# Altium PCB TPA6120A-PCB.pcbdoc
Units mil, origin at the board's own origin, x right, y up, seen from the top; angles counter-clockwise.
Board outline not stored, 2 copper layers (Top Layer, Bottom Layer); 13 components, 0 nets, 43 pads, 0 vias.
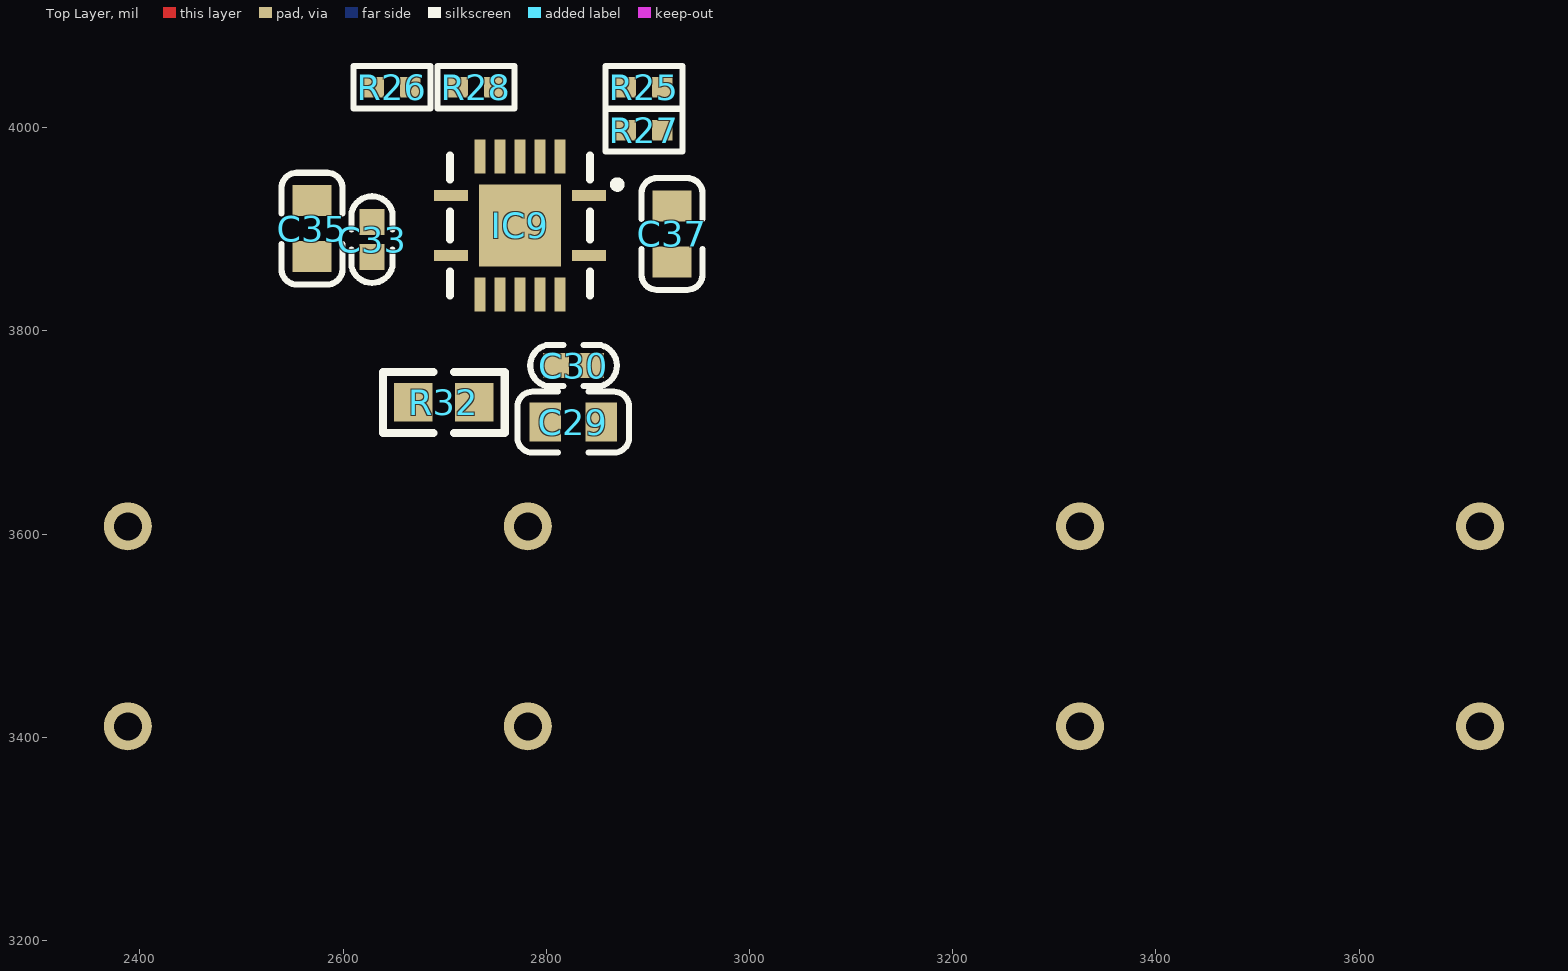
[diagram p0: Top Layer view]
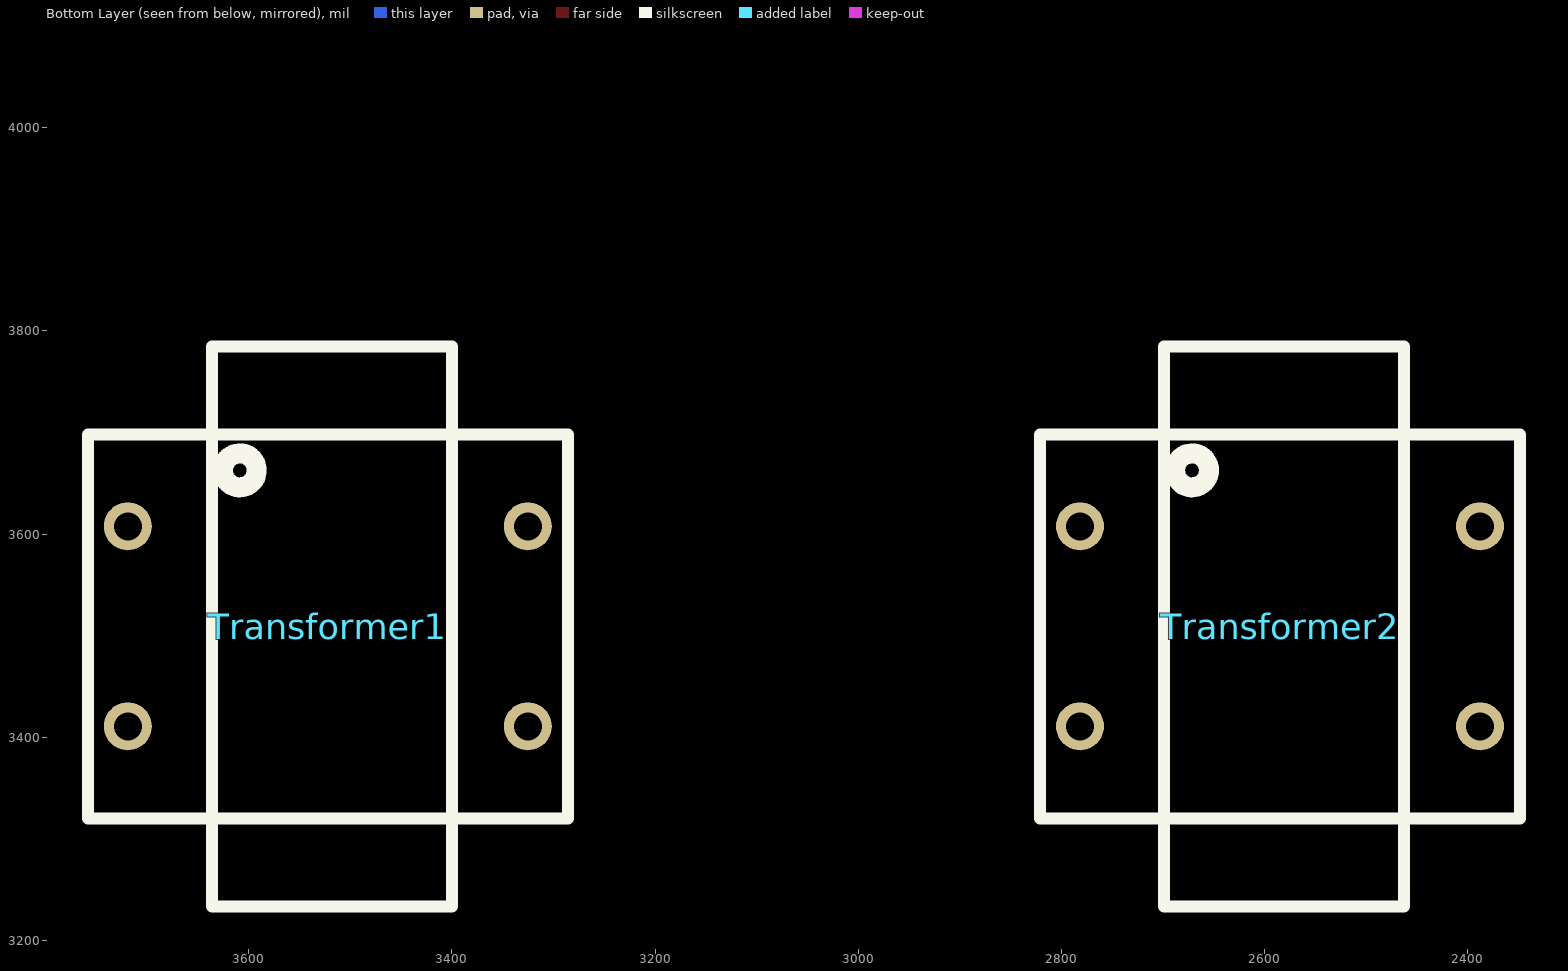
[diagram p1: Bottom Layer view, seen from below]

## Layer stack, top to bottom
Top Solder: solder mask 0.4, Solder Resist, Dk 3.5
Top Layer: signal copper 1.4
Dielectric 1: dielectric 12.6, FR-4, Dk 4.8
Bottom Layer: signal copper 1.4
Bottom Solder: solder mask 0.4, Solder Resist, Dk 3.5

## Components (designator, comment, footprint, x,y, rotation, side; value= is the part's Value field where it differs from the comment)
C29 "10uF 16V" 0603C 2826.57,3710.13 r180 top
C30 "100nF 16V" 0402C 2826.89,3765.86 r0 top
C33 "100nF 16V" 0402C 2628.5,3889.84 r90 top
C35 "10uF 16V" 0603C 2569.45,3900.58 r270 top
C37 "10uF 16V" 0603C 2923.78,3895.35 r270 top
IC9 "TPA6120A2RGYT" RGY-(S-PVQFN-N14) 2774.17,3903.75 r180 top
R25 "1k" 0402R 2896.22,4039.84 r0 top
R26 "1k" 0402R 2648.19,4039.84 r0 top
R27 "1k" 0402R 2896.22,3997.32 r0 top
R28 "1k" 0402R 2730.87,4039.84 r0 top
R32 "0R" 0603R 2699.17,3729.61 r0 top
Transformer1 "Transformer" EE13 3522.2,3509.13 r180 bottom
Transformer2 "Transformer" EE13 2585,3509.13 r180 bottom

## Footprints (in the part's own frame and the unit in brackets; to place one, negate y for a bottom-side part, rotate by r counter-clockwise, add the part's x,y. Pads: shape width x height; smd on the part's side, far side on the other; paste and mask are expansions set on the pad)
0402C [mm]
  rect 0.65x0.62 smd: 1(-0.44,0) 2(0.44,0)
  silkscreen extent -1.08,-0.51 1.08,0.51, body extent -0.51,-0.25 0.49,0.25, height 0.55
0402R [mil]
  rect 20x20 smd: 1(-18,0) 2(18,0)
  silkscreen extent -38,-21 38,21, body extent -20,-11 20,11, height 16
0603C [mm]
  rect 0.78x0.98 smd: 1(-0.7,0) 2(0.7,0)
  silkscreen extent -1.4,-0.76 1.4,0.76, body extent -0.8,-0.4 0.8,0.4, height 0.87
0603R [mil]
  rect 38x38 smd: 1(-30,0) 2(30,0)
  silkscreen extent -60,-30 60,30, body extent -31,-17 32,17, height 24
EE13 [mm] "600,1:1音频变压器"
  round 1.2 hole 0.7: 1(-5,2.5) 3(-5,-2.5) 4(5,-2.5) 6(5,2.5)
  silkscreen extent -6,-7 6,7, body extent -6.4,-6.61 6,6.61, height 12.38
RGY-(S-PVQFN-N14) [mm]
  rect 0.85x0.28 smd: 1(-1.725,-0.75) 7(1.725,-0.75) 8(1.725,0.75) 14(-1.725,0.75)
  rect 0.28x0.85 smd: 2(-1,-1.725) 3(-0.5,-1.725) 4(0,-1.725) 5(0.5,-1.725) 6(1,-1.725) 9(1,1.725) 10(0.5,1.725) 11(0,1.725) 12(-0.5,1.725) 13(-1,1.725)
  rect 2.05x2.05 smd: 15(0,0)
  silkscreen extent -2.51,-1.75 1.75,1.75, body extent -1.78,-1.78 1.78,1.78, height 0.8

## Part data
C29 C35 C37: library part CAP-NP
C30 C33: library part CAP-NP, Capacitance=100nF, Case/Package=0402, Case Code (Metric)=1005, Dielectric=X7R, Manufacturer 1=Samsung, Manufacturer Part Number 1=CL05B104KO5NNNC, Max Operating Temperature=125°C, Min Operating Temperature=-55°C, Package Quantity=1, Supplier Part Number 1=C1525, Tolerance=10%, Voltage=16V, Case Code (Imperial)=0402, ComponentLink1Description=http://www1.futureelectronics.com/doc/SAMSUNG%20PASSIVE/CL05B104KQ5NNNC.pdf?src-supplier=Future+Electronics, ComponentLink1URL=http://www1.futureelectronics.com/doc/SAMSUNG%20PASSIVE/CL05B104KQ5NNNC.pdf?src-supplier=Future+Electronics, ComponentLink2Description=https://www.verical.com/server-webapp/html/getDatasheet?partID=359683&src-supplier=Verical, ComponentLink2URL=https://www.verical.com/server-webapp/html/getDatasheet?partID=359683&src-supplier=Verical, ComponentLink3Description=https://www.distrelec.biz/Web/Downloads/_e/ng/MLCC_CatalogDownload2013_ENG.pdf?mime=application%2Fpdf&src-supplier=Distrelec, ComponentLink3URL=https://www.distrelec.biz/Web/Downloads/_e/ng/MLCC_CatalogDownload2013_ENG.pdf?mime=application%2Fpdf&src-supplier=Distrelec, ComponentLink4Description=https://produktinfo.conrad.com/datenblaetter/450000-474999/458718-da-01-en-VS_KONDENSATOR_0402.pdf?src-supplier=Conrad, ComponentLink4URL=https://produktinfo.conrad.com/datenblaetter/450000-474999/458718-da-01-en-VS_KONDENSATOR_0402.pdf?src-supplier=Conrad, Contact Plating=Tin, Depth=0.5mm, Description 1="CAP CER 0.1UF 16V X7R 0402", Height 1=0.5mm, Lead Free="Lead Free", Length=1mm, Material=Ceramic, Mount="Surface Mount", Packaging="Tape and Reel", Pricing 1="100=0.0023, 1000=0.002, 3000=0.0018, 10000=0.0017, 50000=0.0017, 100000=0.0017, 100=0.0021, 1000=0.0018, 3000=0.0017, 10000=0.0016, 50000=0.0016, 100000=0.0016, 100=0.0107, 1000=0.0094, 3000=0.0087, 10000=0.008, 50000=0.008, 100000=0.008, 100=0.0102, 1000=0.0089, 3000=0.0083, 10000=0.0077, 50000=0.0077, 100000=0.0077, 100=0.0014, 1000=0.0012, 3000=0.0011, 10000=0.001, 50000=0.001, 100000=0.001, 100=0.0012, 1000=0.0011, 3000=0.001, 10000=0.0009, 50000=0.0009, 100000=0.0009, 100=0.0124, 1000=0.0109, 3000=0.0101, 10000=0.0093, 50000=0.0093, 100000=0.0093, 100=0.1676, 1000=0.1466, 3000=0.1361, 10000=0.1257, 50000=0.1257, 100000=0.1257, 100=0.0066, 1000=0.0058, 3000=0.0054, 10000=0.005, 50000=0.005, 100000=0.005, 100=0.1289, 1000=0.1128, 3000=0.1048, 10000=0.0967, 50000=0.0967, 100000=0.0967, 100=0.0142, 1000=0.0125, 3000=0.0116, 10000=0.0107, 50000=0.0107, 100000=0.0107, 100=0.0022, 1000=0.0019, 3000=0.0018, 10000=0.0016, 50000=0.0016, 100000=0.0016, 100=0.0016, 1000=0.0014, 3000=0.0013, 10000=0.0012, 50000=0.0012, 100000=0.0012 (AUD)", Radiation Hardening=No, Stock 1=5012200, Supplier 1=LCSC, Thickness=0.022inch, Voltage Rating=16V, Voltage Rating (DC)=16V, Width=0.02inch
IC9: "耳放芯片", Manufacturer_Name="Texas Instruments", Mouser Part Number=595-TPA6120A2RGYT, Arrow Part Number=TPA6120A2RGYT, Arrow Price/Stock=https://www.arrow.com/en/products/tpa6120a2rgyt/texas-instruments, Datasheet Link=http://www.ti.com/lit/gpn/tpa6120a2, Manufacturer_Part_Number=TPA6120A2RGYT, Mouser Price/Stock=https://www.mouser.co.uk/ProductDetail/Texas-Instruments/TPA6120A2RGYT?qs=bZA2O%252B%252B1GJuCTwjuP6NvCw%3D%3D
R25 R26 R27 R28 R32: library part RES
Transformer1 Transformer2: "BOURNS 600ohms 1:1 Audio &Signal Transformers"

## Nets (pads, with @x,y where several pads share a name; then routed paths per layer and width w, separated by ;. In a path a pad name is that pad's centre, name@x,y a point inside that pad or via, vN(x,y) a via of type N, cw(c..) or ccw(c..) an arc to the next point about the centre after c; other vN are vias at no path point)
pads on no net: C29.1 C29.2 C30.1 C30.2 C33.1 C33.2 C35.1 C35.2 C37.1 C37.2 IC9.1 IC9.2 IC9.3 IC9.4 IC9.5 IC9.6 IC9.7 IC9.8 IC9.9 IC9.10 IC9.11 IC9.12 IC9.13 IC9.14 IC9.15 R25.1 R25.2 R26.1 R26.2 R27.1 R27.2 R28.1 R28.2 R32.1 R32.2 Transformer1.1 Transformer1.3 Transformer1.4 Transformer1.6 Transformer2.1 Transformer2.3 Transformer2.4 Transformer2.6